# Altium PCB V2.PcbDoc
Units mil, origin at the board's own origin, x right, y up, seen from the top; angles counter-clockwise.
Board outline 2440.94 x 1653.54 mil, 2 copper layers (Top Layer, Bottom Layer), stack 65.792 mil thick; 19 components, 14 nets, 85 pads, 12 vias.
Unrouted connection lines stored in the file: 23.
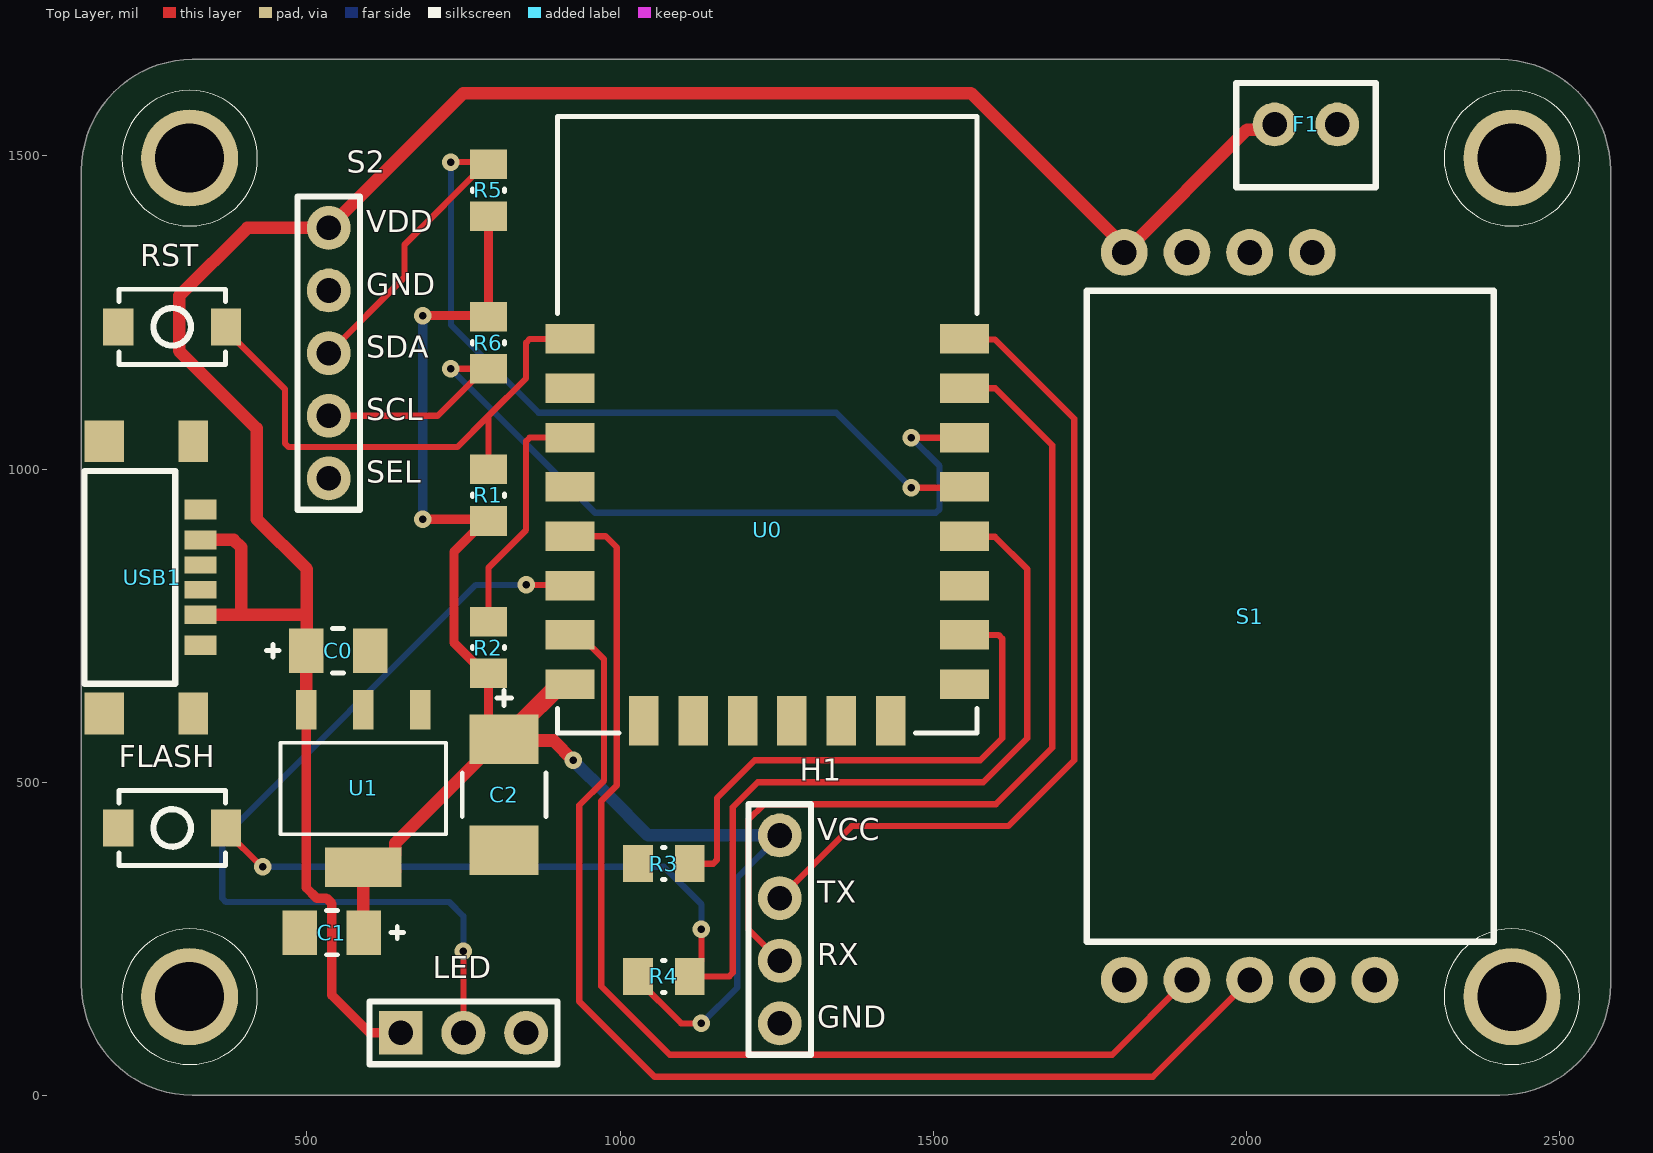
[diagram p0: Top Layer view]
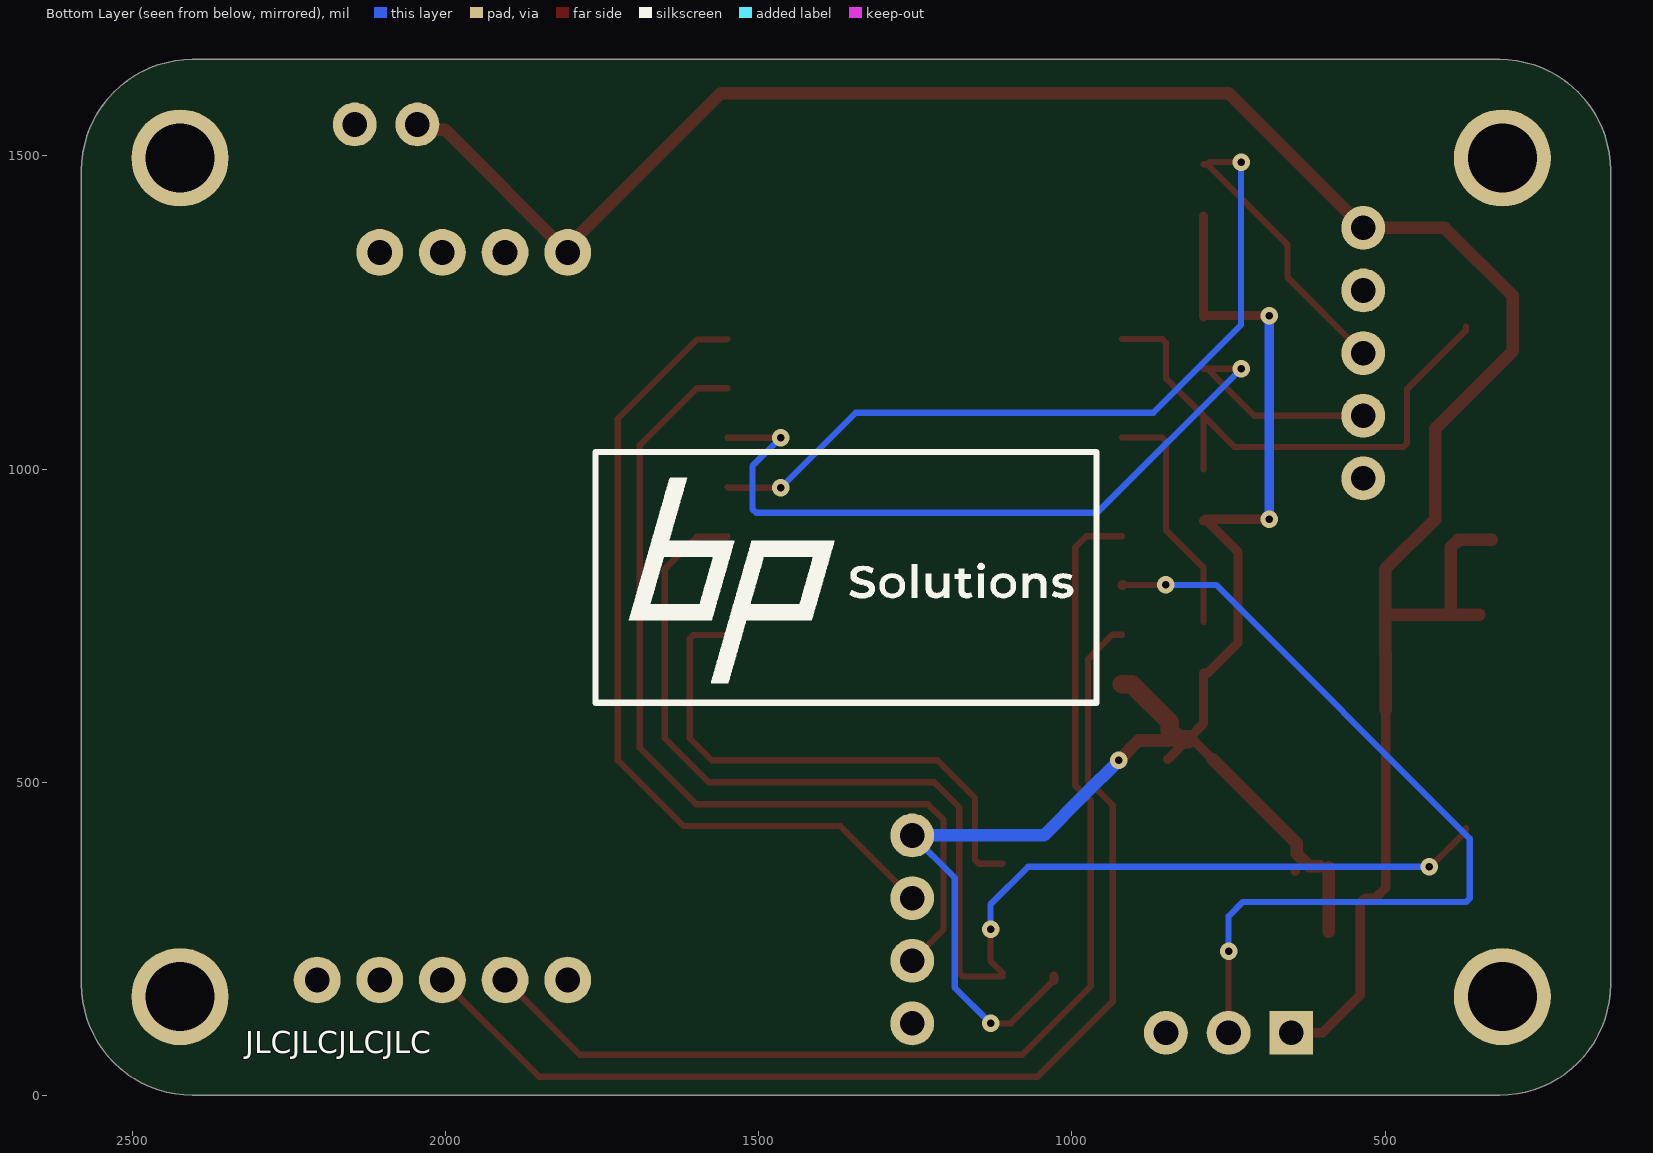
[diagram p1: Bottom Layer view, seen from below]
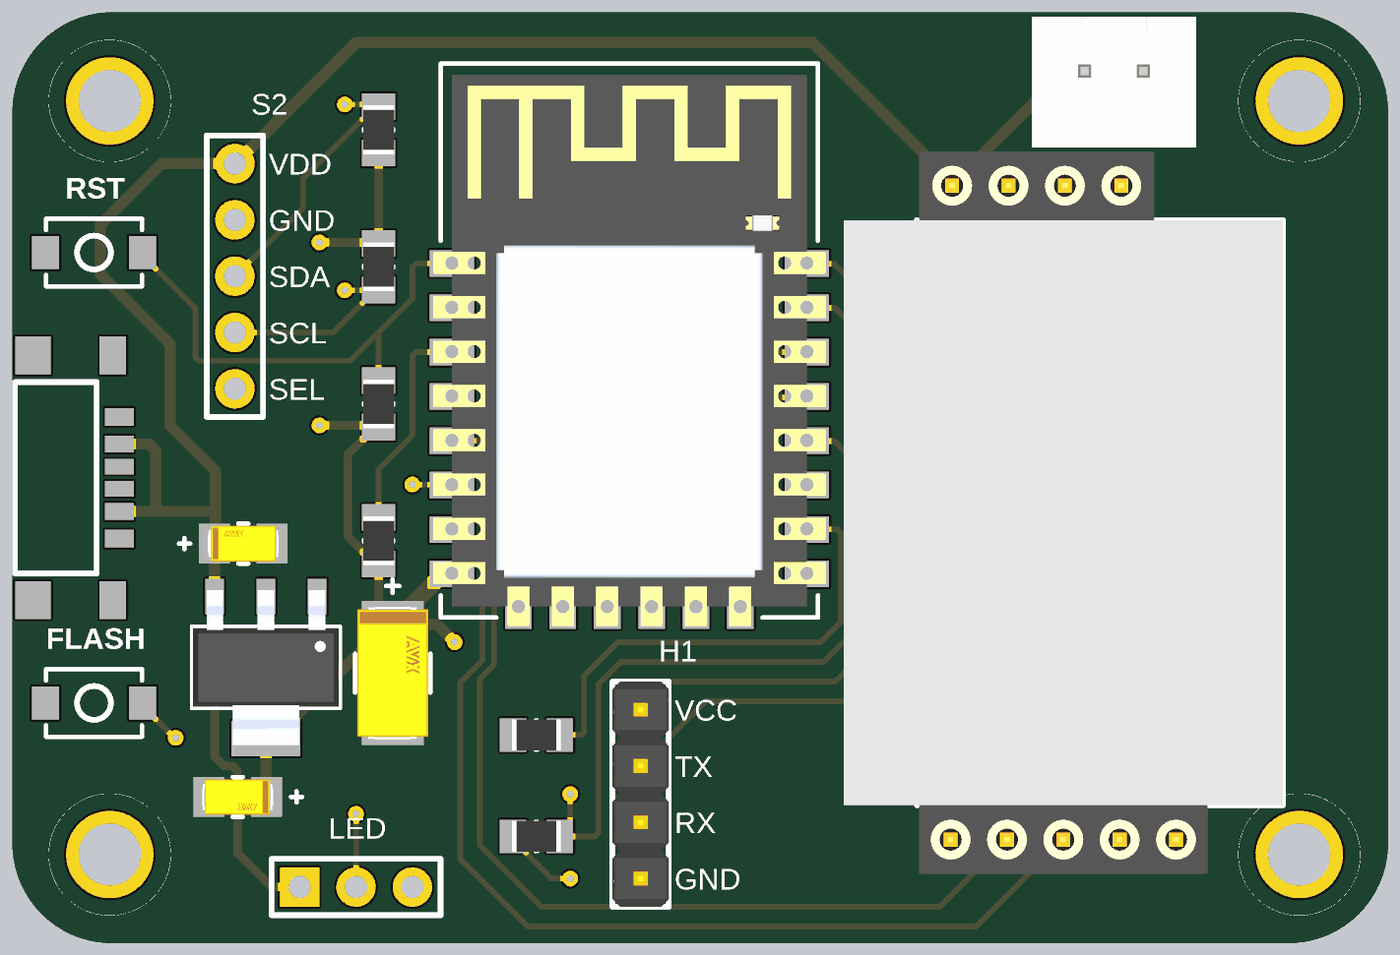
[diagram p2: 3D render of the assembled board from above, using the file's embedded part models]

## Layer stack, top to bottom
Top Solder: solder mask 0.4, Solder Resist, Dk 3.5
Top Layer: signal copper 1.4
Dielectric 1: dielectric 62.9921, FR-4, Dk 4.8
Bottom Layer: signal copper 1.4
Bottom Solder: solder mask 0.4, Solder Resist, Dk 3.5

## Board outline
140.25,177.42 140.25,1476.63 cw(c317.42,1476.63) 317.42,1653.79 2404.03,1653.79 cw(c2404.03,1476.63) 2581.19,1476.63 2581.19,177.42 cw(c2404.03,177.42) 2404.03,0.25 317.42,0.25 cw(c317.42,177.42)

## Design rules (kind name [scope] priority, off if disabled: settings)
Clearance [All] p1: gap=10 ignorepadtopadclearanceinfootprint=FALSE except(0: Arc-Hole Track-Hole SMDPad-Hole THPad-Hole Via-Hole Fill-Hole Poly-Hole Region-Hole Text-Hole)
PolygonConnect [All] p1: connectstyle=Relief reliefconductorwidth=10 reliefentries=4 polygonreliefangle="90 Angle" airgapwidth=10
RoutingVias [All] p1: holewidth=12 width=28 viastyle="Through Hole" minholewidth=20 minwidth=20 maxholewidth=28 maxwidth=50
SolderMaskExpansion [All] p1: expansion=4 istentingtop=FALSE
Width [All] p1: maxlimit=30 minlimit=10 preferedwidth=15 minimp=50.000000 maximp=50.000000 favimp=50.000000
30 further rules are at their usual default settings.

## Classes and differential pairs
component class Sheet1: C1 C2 F1 FLASH H1 LED R1 R2 R3 R4 R5 R6 RST S1 S2 U0 U1 USB1

## Components (designator, comment, footprint, x,y, rotation, side; value= is the part's Value field where it differs from the comment)
C0 "TAJA106K010RNJ" FP-TAJA-MFG 550,710 r180 top
C1 "TAJA226K010RNJ" FP-TAJA-MFG 540,260 r0 top
C2 "TAJC107K006RNJ" FP-TAJC-MFG 815,480 r90 top
F1 "FAN 5V" "New footprint 1"#1 2095,1550 r90 top
FLASH "ALPSALPINE SKRKAEE020" Resistor 285,427.02 r180 top
H1 "UART_HEADER" PRGM_HEADER-Footprint-1#1 1255,265 r270 top
LED "LED-Connector" LED-Connector-Footprint-1 750,100 r0 top
R1 "Resistor 10k +/-1% 0805 125 mW" RESC2013X50X35ML15T15 790,958.33 r90 top value=10k
R2 "Resistor 10k +/-1% 0805 125 mW" RESC2013X50X35ML15T15 790,715 r90 top value=10k
R3 "Resistor 10k +/-1% 0805 125 mW" RESC2013X50X35ML15T15 1070,370 r0 top value=10k
R4 "Resistor 10k +/-1% 0805 125 mW" RESC2013X50X35ML15T15 1070,190 r0 top value=10k
R5 "Resistor 10k +/-1% 0805 125 mW" RESC2013X50X35ML15T15 790,1445 r270 top value=10k
R6 "Resistor 10k +/-1% 0805 125 mW" RESC2013X50X35ML15T15 790,1201.67 r90 top value=10k
RST "ALPSALPINE SKRKAEE020" Resistor 285,1227.02 r0 top
S1 "004-0-0053" 004-0-0053-Footprint-1 1805,765 r90 top
S2 "SEN54" PRGM_HEADER-Footprint-1#2 535,1185 r270 top
U0 "ESP-12F" ESP-12F 1235,1070.67 r0 top
U1 "SK1117-3.3" SOT230 590,490 r270 top
USB1 "UJC-HP-G-5-SMT-TR" "New footprint 1"#2 330,827.02 r270 top

## Footprints (in the part's own frame and the unit in brackets; to place one, negate y for a bottom-side part, rotate by r counter-clockwise, add the part's x,y. Pads: shape width x height; smd on the part's side, far side on the other; paste and mask are expansions set on the pad)
004-0-0053-Footprint-1 [mm]
  round 1.9 hole 1: 1(14.75,0) 2(14.75,-2.54) 3(14.75,-5.08) 4(14.75,-7.62) 5(-14.75,0) 6(-14.75,-2.54) 7(-14.75,-5.08) 8(-14.75,-7.62) 9(-14.75,-10.16)
  silkscreen extent -13.2,-14.98 13.2,1.52, body extent -16.3,-14.98 16.3,4.82, height 19
ESP-12F [mm]
  rect 2x1.2 smd: 1(-8,3.48) 2(-8,1.48) 3(-8,-0.52) 4(-8,-2.52) 5(-8,-4.52) 6(-8,-6.52) 7(-8,-8.52) 8(-8,-10.52) 15(8,-10.52) 16(8,-8.52) 17(8,-6.52) 18(8,-4.52) 19(8,-2.52) 20(8,-0.52) 21(8,1.48) 22(8,3.48)
  rect 1.2x2 smd: 9(-5,-12) 10(-3,-12) 11(-1,-12) 12(1,-12) 13(3,-12) 14(5,-12)
  silkscreen extent -8.5,-12.5 8.5,12.5, body extent -8.85,-12.9 8.85,12, height 3.1
FP-TAJA-MFG [mm]
  rect 1.4x1.8 smd paste+0 mask+0: 1(-1.3,0) 2(1.3,0)
  silkscreen extent -0.23,-0.9 2.9,0.9, body extent -2.1,-1 2.1,1, height 0.25
FP-TAJC-MFG [mm]
  rect 2x2.8 smd paste+0 mask+0: 1(-2.25,0) 2(2.25,0)
  silkscreen extent -0.87,-1.7 4.23,1.7, body extent -3.35,-1.8 3.35,1.8, height 0.25
LED-Connector-Footprint-1 [mil]
  rect 70x70 hole 39.37: 1(-100,0)
  round 70 hole 39.37: 2(0,0) 3(100,0)
  silkscreen extent -150,-50 150,50
"New footprint 1"#1 [mil]
  round 70 hole 39.37: 1(0,50) 2(0,-50)
  silkscreen extent -100,-111 66,111, body extent -136,-146 96,146, height 276
"New footprint 1"#2 [mil]
  rect 27.56x51.18 smd: CC1(-19.68,0) CC2(19.69,0)
  rect 31.5x51.18 smd: GND1(-108.27,0) GND2(108.27,0)
  rect 66.93x47.24 smd: GNDL1(-217.32,-11.42) GNDR1(217.32,-11.42)
  rect 66.93x62.99 smd: GNDL2(-217.32,-153.15) GNDR2(217.32,-153.15)
  rect 29.92x51.18 smd: Vbus1(-59.84,0) Vbus2(59.84,0)
  silkscreen extent -170,-185 170,-40, body extent -227,-264 227,18, height 124
PRGM_HEADER-Footprint-1#1 [mil]
  round 70 hole 39.37: 1(-150,0) 2(-50,0) 3(50,0) 4(150,0)
  silkscreen extent -200,-50 200,50, body extent -200,-50 200,50, height 374
PRGM_HEADER-Footprint-1#2 [mil]
  round 70 hole 39.37: 1(-200,0) 2(-100,0) 3(0,0) 4(100,0) 5(200,0)
  silkscreen extent -250,-50 250,50
RESC2013X50X35ML15T15 [mm] "Chip Resistor, 2-Leads, Body 2.2x1.4mm, IPC Low Density"
  rect 1.2x1.5 smd: 1(-1.05,0) 2(1.05,0)
  silkscreen extent -0.05,-0.65 0.05,0.65, body extent -1.1,-0.7 1.1,0.7, height 0.5
Resistor [mm]
  rect 1.23x1.5 smd: 1(-2.185,0) 2(2.185,0)
  silkscreen extent -2.16,-1.52 2.16,1.52
SOT230 [mil]
  rect 63x33 smd: 1(-126,91) 2(-126,0) 3(-126,-91)
  rect 63x122 smd: 4(126,0)
  silkscreen extent -73,-132 73,132, body extent -138,-128 138,128, height 71

## Part data
C0: library part CMP-2000-07217-2, "10uF 10V  ±10% 3Ω 1206  SMD Tantalum Capacitor", Capacitance=10uF, Case Code (Imperial)=1206, Case Code (Metric)=3216, Dielectric Material=Tantalum, ESR (Equivalent Series Resistance)=3R, Leakage Current=1uA, Max Operating Temperature=125°C, Min Operating Temperature=-55°C, Package Quantity=1, Tolerance=10%, Voltage=10V, Case/Package=1206, Construction=Flat, Depth=1.6mm, Dissipation Factor=6%, Features="General Purpose", Height=1.6mm, Height - Seated (Max)=0.071inch, Lead Free="Lead Free", Length=3.2mm, Mount="Surface Mount", Number of Pins=2, Packaging="Tape and Reel", Polarity=Polar, Q Factor=6, Radiation Hardening=No, REACH SVHC="No SVHC", RoHS Compliant=Yes, Series=TAJ, Termination=SMD/SMT, Voltage Rating=10V, Voltage Rating (DC)=10V, Width=1.6mm
C1: library part CMP-2000-07524-2, "22uF 10V  ±10% 3Ω 1206  SMD Tantalum Capacitor", Capacitance=22uF, Case Code (Imperial)=1206, Case Code (Metric)=3216, Dielectric Material=Tantalum, ESR (Equivalent Series Resistance)=3R, Leakage Current=2.2uA, Max Operating Temperature=125°C, Min Operating Temperature=-55°C, Package Quantity=1, Tolerance=10%, Voltage=10V, Case/Package=1206, Construction=Flat, Depth=1.6mm, Dissipation Factor=8%, Features="General Purpose", Height=1.6mm, Height - Seated (Max)=0.071inch, Lead Free="Lead Free", Lead Pitch=1.1mm, Length=3.2mm, Mount="Surface Mount", Number of Pins=2, Packaging="Tape and Reel", Polarity=Polar, Radiation Hardening=No, REACH SVHC="No SVHC", RoHS Compliant=Yes, Series=TAJ, Termination=SMD/SMT, Voltage Rating=10V, Voltage Rating (DC)=10V, Width=1.6mm
C2: library part CMP-04424-000198-1, "100uF 6.3V  ±10% 900mΩ 2312  SMD Tantalum Capacitor", Capacitance=100uF, Case Code (Imperial)=2312, Case Code (Metric)=6032, Case/Package=Molded, Dielectric Material=Tantalum, ESR (Equivalent Series Resistance)=900mR, Leakage Current=6.3uA, Max Operating Temperature=125°C, Min Operating Temperature=-55°C, Package Quantity=1, Tolerance=10%, Voltage Rating=6.3V, Construction=Flat, Depth=3.2mm, Dissipation Factor=6%, Features="General Purpose", Height=2.6mm, Height - Seated (Max)=0.11inch, Lead Free="Lead Free", Length=6mm, Mount="Surface Mount", Packaging="Tape and Reel", Polarity=Polar, Radiation Hardening=No, REACH SVHC="No SVHC", RoHS Compliant=Yes, Series=TAJ, Termination=SMD/SMT, Width=3.2mm
F1: library part CMP-001-0000-2, "5v fan"
FLASH RST: library part CMP-011-00013-1, "50mA Brick nogging SPST 12V SMD Tactile Switches ROHS"
H1: library part CMP-001-0001-4, "programming header"
LED: library part CMP-00030-00002-1, "Connector for LED"
R1 R2 R3 R4 R5 R6: library part CMP-009-00018-5, "Chip Resistor, 10 KOhm, +/- 1%, 125 mW, -55 to 155 degC, 0805 (2012 Metric)", Case/Package=0805, Max Operating Temperature=155°C, Min Operating Temperature=-55°C, Power=125mW, Tolerance=1%, Voltage Rating=150V, Mounting Technology=SM, Pins=2, RoHS Compliant=True
S1: library part CMP-010-00025-5, "Carbon Dioxide (CO2) Sensor PWM, UART", Package=None, Component Type=Standard, Design Item ID=004-0-0053, MF="Senseair North America Inc.", MP=006-0-0002, Pin Count=9
S2: library part CMP-00030-00001-2, "PPM particle and voc sensor"
U0: library part CMP-020-000000-2, "WiFi Module", Package=Package, Availability="No availability data", Check_prices=https://www.snapeda.com/parts/ESP-12F/AI-Thinker/view-part/6648243/?ref=eda, Component Type=Standard, Design Item ID=ESP-12F, MF=AI-Thinker, MP=ESP-12F, Pin Count=22, Price=None, SnapEDA_Link=https://www.snapeda.com/parts/ESP-12F/AI-Thinker/view-part/6648243/?ref=snap, Source=ESP-12F.SchLib
U1: library part CMP-019-00049-1, "70dB@(120Hz) Fixed 3.3V~3.3V Positive 18V SOT-223 Linear Voltage Regulators (LDO) ROHS", Package="SOT-223-4 Texas Instruments", Availability=Unavailable, Component Type=Standard, Design Item ID=SK1117-3.3, MF=Shikues, MP=SK1117-3.3, Pin Count=4, Price=None, SnapEDA_Link=https://www.snapeda.com/parts/LM1117-3.3/Texas%20Instruments/view-part/549181/?ref=snap, Source=SnapEDAsch.SchLib
USB1: library part CMP-002-00071-3, "TYPE C, 20 VDC, 3 A, HORIZONTAL,"

## Free pads (board coordinates)
  round 155 hole 110.24: 1(312.98,157.73) 2(2423.72,157.73) 3(2423.72,1496.31) 4(312.98,1496.31)

## Via types
v1: diameter 28, hole 12, Top Layer to Bottom Layer, 12 vias

## Nets (pads, with @x,y where several pads share a name; then routed paths per layer and width w, separated by ;. In a path a pad name is that pad's centre, name@x,y a point inside that pad or via, vN(x,y) a via of type N, cw(c..) or ccw(c..) an arc to the next point about the centre after c; other vN are vias at no path point)
+5: C0.2 F1.1 LED.1 S1.1 S2.1 U1.3 USB1.Vbus1 USB1.Vbus2 | length 3769.2
  Top Layer w15: U1.3 499,331.6 515.6,315 531.21,315 540,306.21 540,160 600,100 LED.1
  Top Layer w20: USB1.Vbus1 383.28,886.86 395,875.15 395,767.18 ; USB1.Vbus2@350,767.18 395,767.18 ; U1.3 498.91,616.09 498.91,704.91 498.82,705 500,706.18 500,765 ; F1.1 2036.89,1541.89 2001.18,1541.89 S1.1 1805,1355 1560,1600 750,1600 S2.1 405,1385 296.21,1276.21 296.21,1188.79 420,1065 420,920 500,840 500,765 ; 395,767.18 497.82,767.18 500,765
GND: C0.1 C1.1 C2.1 F1.2 FLASH.2 H1.4 LED.3 pad.1 pad.2 pad.3 pad.4 R3.1 RST.1 S1.2 S2.2 S2.5 U0.15 U1.1 USB1.GND1 USB1.GND2 USB1.GNDL1 USB1.GNDL2 USB1.GNDR1 USB1.GNDR2
NetFLASH_1: FLASH.1 R4.2 U0.18 | length 2178.3
  Top Layer w10: FLASH.1 371.02,421.71 427.73,365 v1(430,365) ; v1(1130,265) v1(1130,265) 1129.96,214.53 1111.34,195.91 R4.2 1174.14,190 1180,195.86 1180,460 1220,500 1580,500 1650,570 1650,840.43 1598.47,891.96 1550.72,891.96 U0.18
  Bottom Layer w10: v1(430,365) 1070,365 1130,305 v1(1130,265)
NetH1_2: H1.2 U0.22 | length 1334.3
  Top Layer w10: H1.2 1370,430 1620,430 1725,535 1725,1080.35 1598.47,1206.88 1550.76,1206.88 U0.22
NetH1_3: H1.3 U0.21 | length 1439
  Top Layer w10: H1.3 1205,265 1205,440 1230,465 1600,465 1690,555 1690,1037.87 1598.94,1128.94 U0.21
NetLED_2: LED.2 U0.6 | length 1401.6
  Top Layer w10: LED.2 v1(750,230) ; v1(850,815) U0.6@919.02,815
  Top Layer w15: U0.6@919.02,815 U0.6
  Bottom Layer w10: v1(750,230) 750,286.21 727.43,308.79 370.86,308.79 365,314.64 365,410 770,815 v1(850,815)
NetR1_2: R1.2 RST.2 U0.1 | length 872.7
  Top Layer w10: RST.2 371.02,1221.71 465,1127.73 465,1040.86 470.86,1035 740,1035 790,1085 ; R1.2 790,1085 ; U0.1 855.86,1207.68 850,1201.82 850,1145 790,1085
NetR2_2: R2.2 U0.3 | length 385.3
  Top Layer w10: R2.2 790,842.63 850,902.63 850,1044.34 855.86,1050.2 U0.3
NetR3_2: R3.2 U0.16 | length 861.2
  Top Layer w10: R3.2 1148.79,370 1154.65,375.86 1154.65,474.65 1215,535 1575,535 1610,570 1610,729.36 1604.14,735.21 U0.16
NetR5_1: R5.1 S2.3 U0.19 | length 1654.3
  Top Layer w10: S2.3 655.98,1305.98 655.98,1358.22 R5.1@784.09,1486.34 ; v1(730,1490) 780.43,1490 R5.1@784.09,1486.34 ; R5.1 R5.1@784.09,1486.34 ; v1(1465,970) 1548.5,970 U0.19
  Bottom Layer w10: v1(730,1490) 730,1230 870,1090 1345,1090 v1(1465,970)
NetR6_1: R6.1 S2.4 U0.20 | length 1435.5
  Top Layer w10: S2.4 708.77,1085 R6.1@783.77,1160 ; v1(730,1160) R6.1@783.77,1160 ; R6.1 789.67,1160 R6.1@783.77,1160 ; v1(1465,1050) 1549.76,1050 U0.20
  Bottom Layer w10: v1(730,1160) 960,930 1504.14,930 1510,935.86 1510,1005 v1(1465,1050)
NetS1_6: S1.6 U0.5 | length 1822.7
  Top Layer w10: U0.5 976.96,892.72 994.82,874.86 994.82,494.82 970,470 970,174.3 1079.3,65 1785.71,65 S1.6
NetS1_7: S1.7 U0.7 | length 1816.9
  Top Layer w10: U0.7 935.79,735.24 974.41,696.61 974.41,502.69 935,463.28 935,150 1055,30 1850.71,30 S1.7
VCC: C1.2 C2.2 H1.1 R1.1 R2.1 R4.1 R5.2 R6.2 U0.8 U1.4 | length 2666.7
  Top Layer w10: R4.1@1028.66,184.09 1097.76,115 v1(1130,115)
  Top Layer w15: C1.2@590,261.18 C1.2 ; U1.4 591.51,365.51 U1.4@604.3,365.51 ; U1.4@643.5,358 U1.4@643.5,359.7 ; v1(685,920) 786.99,920 R1.1 ; v1(685,1245) 788.01,1245 R6.2 R5.2 ; C2.2@775.5,536.71 807.37,568.58 C2.2 ; R1.1@784.09,916.99 735,867.9 735,722.76 784.09,673.66 R2.1 790,593.58 C2.2@811.18,572.4 ; C2.2@822.87,560.71 C2.2@846.87,536.71 ; R4.1@1028.66,184.09 R4.1
  Top Layer w20: C1.2@590,261.18 U1.4 ; U1.4@604.3,365.51 621.01,365.51 641,385.5 641,402.21 C2.2@775.5,536.71 ; C2.2@845.88,566.6 893.4,566.6 v1(925,535)
  Top Layer w30: C2.2 830.75,568.58 843.9,581.73 843.9,596.1 895.67,647.87 904.29,656.5 U0.8
  Bottom Layer w10: v1(1130,115) 1187.24,172.24 1187.24,347.24 H1.1
  Bottom Layer w15: v1@685,920.1 v1(685,1245)
  Bottom Layer w20: v1(925,535) 980.77,479.23 1045,415 H1.1
pads on no net: S1.3 S1.4 S1.5 S1.8 S1.9 U0.2 U0.4 U0.9 U0.10 U0.11 U0.12 U0.13 U0.14 U0.17 U1.2 USB1.CC1 USB1.CC2

## Other copper
Top Layer:
  pour cut-out: 900,1565 1570,1565 1570,1245 900,1245

## Silkscreen, mask and mechanical layers (free items; w line width, h text height)
Top Overlay:
  circle w0.5: c2423.71,1496.31 r108.27
  circle w0.5: c312.98,1496.31 r108.27
  circle w0.5: c2423.71,157.73 r108.27
  circle w0.5: c312.98,157.73 r108.27
Bottom Overlay:
  drawing of 16 lines, arcs and shapes, not listed
  text "JLCJLCJLCJLC" at 2320.11,55.67 h60
Mechanical 1:
  circle w0.5: c2423.71,157.73 r55.12
  circle w0.5: c312.98,1496.31 r55.12
  circle w0.5: c312.98,157.73 r55.12
  circle w0.5: c2423.71,1496.31 r55.12
  lines w0.5: 140.25,177.42 ccw(c317.42,177.42) 317.42,0.25 2404.03,0.25 ccw(c2404.03,177.42) 2581.19,177.42 2581.19,1476.63 ccw(c2404.03,1476.63) 2404.03,1653.79 317.42,1653.79 ccw(c317.42,1476.63) 140.25,1476.63 140.25,177.42

## Text inside footprints (layer, text, board x,y; h text height)
H1: Top Overlay "GND" at 1315,95.8 h60; Top Overlay "RX" at 1315,195.8 h60; Top Overlay "TX" at 1315,295.8 h60; Top Overlay "VCC" at 1315.06,395.8 h60
S2: Top Overlay "GND" at 595,1265.8 h60; Top Overlay "SCL" at 595,1065.8 h60; Top Overlay "SDA" at 595,1165.8 h60; Top Overlay "VDD" at 595.06,1365.8 h60; Top Overlay "SEL" at 595,965.8 h60